# Allegro board PROJECT_PCB.brd
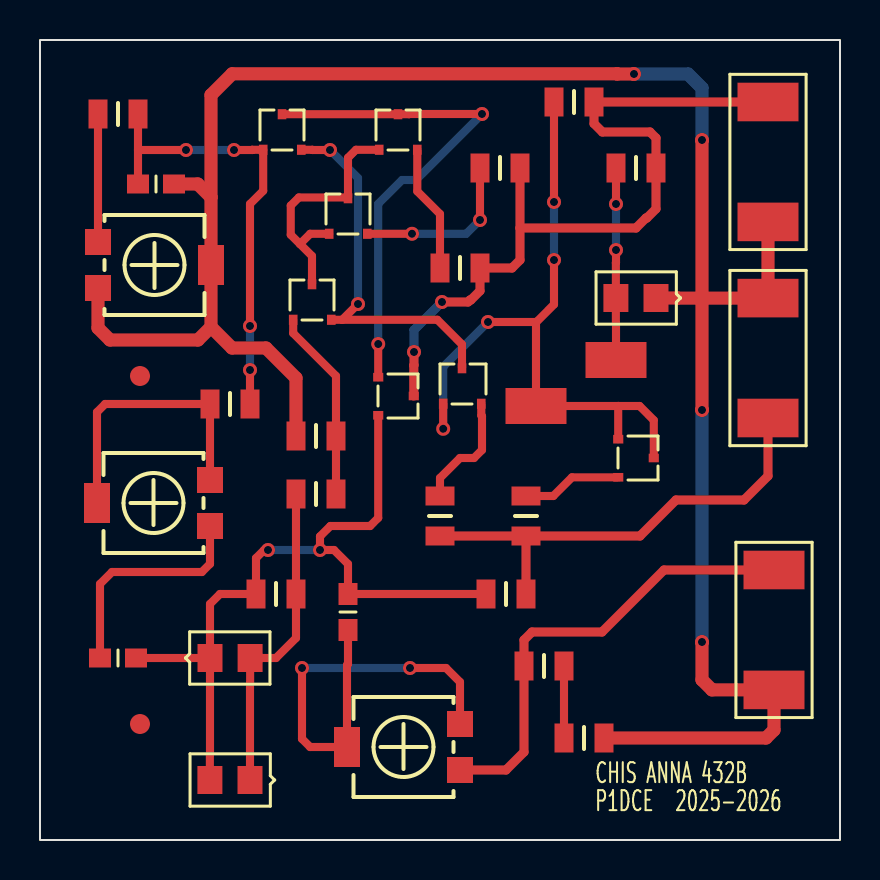
[diagram p0: board, top side]
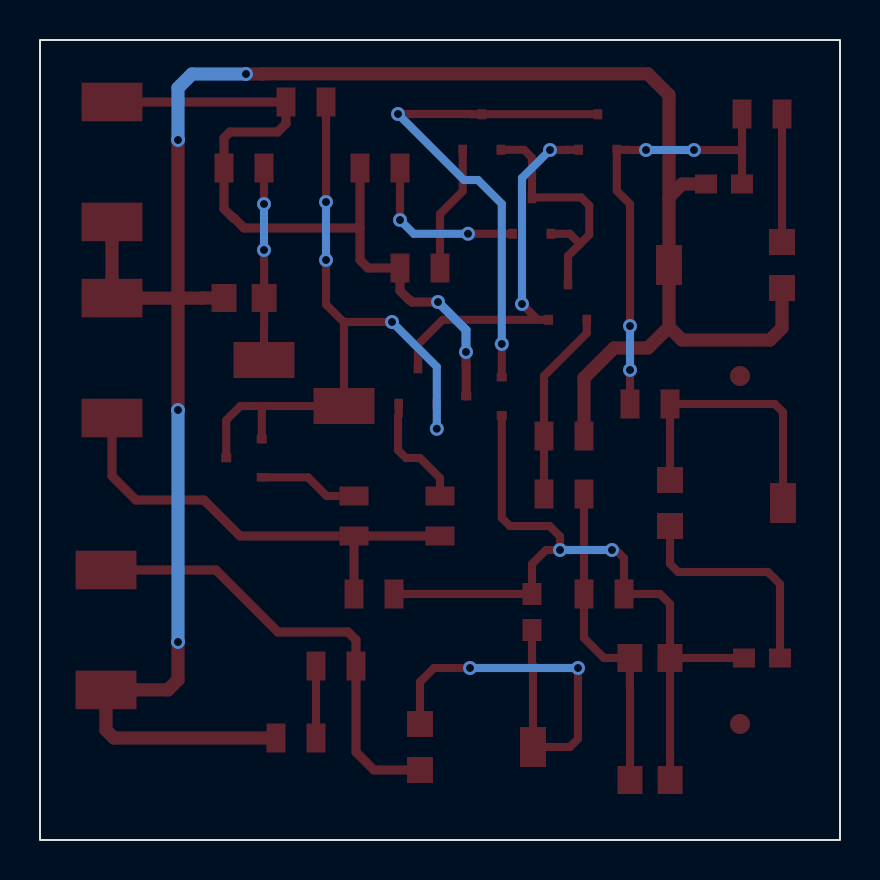
[diagram p1: board, bottom side, seen from below]

Outline 40 x 40 mm; copper layers: TOP, BOTTOM. Coordinates in mm from the lower left corner of the outline.
Outline path: rectangle 0,0 40,40

## Design rules (mm)
nets with their own width: min track width 0.406; nets N97755 N97835 N97875 N97939 N97965 N97969 N97983 N98131 N98141 N98233 N98621 N98633 N98691 N105812 N977031 N977231 N983391 N983651
nets with their own width: min track width 0.457; nets OUT V+ V-
nets with their own width: min track width 0.66; nets GND

## Placement (name value [footprint] x y rotation side)
C1  33n  [CAPC2008X126N_0805]  5.8 32.8 180 top
C2  33n  [CAPC2008X126N_0805]  3.9 9.1 0 top
C3  4.7u  [CAPC2008X126N_0805]  15.4 11.4 270 top
D1  D1N4148  [SMD0805]  8.5 9.1 0 top
D2  D1N4148  [SMD0805]  10.5 3 180 top
D3  5V,LED,LED  [SMD0805]  30.8 27.1 180 top
J1  CON2  [SMR2512]  36.4 36.9 270 top
J2  CON2  [SMR2512]  36.4 21.1 90 top
J3  CON2  [SMR2512]  36.7 13.5 270 top
NOREF  -  []  0 41.3 0 top
NOREF#2  -  [unnamed#2]  5 23.2 0 top
NOREF#3  -  [unnamed#2]  5 5.8 0 top
NOREF#4  -  []  40.8 0 90 top
Q1  QBC856B  [SOT23]  17.9 35.4 90 top
Q2  QBC856B  [SOT23]  15.4 31.2 90 top
Q3  QBC846B  [SOT23]  12.1 35.4 90 top
Q4  QBC846B  [SOT23]  13.6 26.9 90 top
Q5  QBC846B  [SOT23]  29.8 19.1 0 top
Q6  QBC846B  [SOT23]  21.1 22.7 90 top
Q7  QBC856B  [SOT23]  17.8 22.2 0 top
R1  1k  [RES2012X50N_0805]  29.8 33.6 0 top
R2  220  [RES2012X50N_0805]  23 33.6 0 top
R3  220  [RES2012X50N_0805]  21 28.6 0 top
R4  4.7k  [RES2012X50N_0805]  26.7 36.9 0 top
R5  1k  [RES2012X50N_0805]  24.3 16.2 90 top
R6  1k  [RES2012X50N_0805]  20 16.2 90 top
R7  1k  [RES2012X50N_0805]  13.8 20.2 0 top
R8  2k  [RES2012X50N_0805]  13.8 17.3 0 top
R9  100  [RES2012X50N_0805]  11.8 12.3 180 top
R10  10k  [RES2012X50N_0805]  23.3 12.3 180 top
R11  50k  [TS53YL]  21 5.8 0 top
R12  10  [RES2012X50N_0805]  3.9 36.3 0 top
R13  50k  [TS53YL]  2.9 27.6 180 top
R14  10  [RES2012X50N_0805]  9.5 21.8 0 top
R15  50k  [TS53YL]  8.5 18 0 top
R16  330  [RES2012X50N_0805]  25.2 8.7 180 top
R17  68  [RES2012X50N_0805]  27.2 5.1 180 top
TP1  TEST POINT  [SMD_PAD_3-05_1-80]  28.8 24 0 top
TP2  Q5  [SMD_PAD_3-05_1-80]  24.8 21.7 0 top

## Library data of the parts
C1-C3 = C
D1 = 1N4148_3
D2 = 1N4148_4
D3 = LED_2
J1-J3 = CON2
Q1 = QBC856B_2
Q2 = QBC856B_3
Q3 = QBC846B_3
Q4 = QBC846B_5
Q5 = QBC846B_6
Q6 = QBC846B_7
Q7 = QBC856B_4
R1-R10 R12 R14 R16 R17 = R
R11 R13 = POT
R15 = POT_1
TP1 TP2 = TEST POINT

## Footprints (pads in the part's own frame, mm; a bottom-side part is the same pattern mirrored in y, then rotated)
CAPC2008X126N_0805
  rect 1.1x0.95 smd: 1(-0.9,0) 2(0.9,0)
RES2012X50N_0805
  rect 0.95x1.45 smd: 1(-1,0) 2(1,0)
SMD0805
  rect 1.25x1.4 smd: A(2.007,0) C(0,0)
SMD_PAD_3-05_1-80
  rect 3.05x1.8 smd: 1(0,0)
SMR2512
  rect 1.93x3.048 smd: 1(0,0) 2(5.994,0)
SOT23
  rect 0.508x0.432 smd: 1(-0.889,0.94) 2(-0.889,-0.965) 3(0.889,0)
TS53YL
  rect 1.3x1.3 smd: 1(0,0) 3(0,-2.3)
  rect 1.3x2 smd: 2(-5.65,-1.15)
unnamed#2
  round 1 smd: (0,0)

## Nets
GND: C1.1 D3.C(2) J1.2 J2.2 J3.2 R7.1 R13.1 R13.2(T) R17.1
OUT: J3.1 R11.3 R16.2
V+: J1.1 Q7.3 R1.2 R2.2 R3.2 R4.2
V-: J2.1 R5.1 R6.1 R10.1
N97755: D3.A R1.1 TP1.1
N97835: Q1.1 Q2.1 Q2.3 Q4.3
N97875: Q1.3 Q3.3 Q7.1
N97939: Q5.1 Q5.3 Q6.1 R4.1 TP2.1
N97965: C2.2 C3.1 D1.C(2) D2.A Q7.2(E) R9.2 R10.2
N97969: D1.A D2.C(2) R8.1 R9.1
N97983: C3.2 R11.1 R11.2(T)
N98131: C1.2 Q3.1 R12.2 R14.2
N98141: Q4.1 R7.2 R8.2
N98233: Q3.2(E) Q4.2(E) Q6.3
N98621: R14.1 R15.1 R15.2(T)
N98633: C2.1 R15.3
N98691: R12.1 R13.3
N105812: R16.1 R17.2
N977031: Q1.2(E) R3.1
N977231: Q2.2(E) R2.1
N983391: Q5.2(E) R5.2
N983651: Q6.2(E) R6.2

## Via types
v1: diameter 0.7, hole 0.4, TOP to BOTTOM, 26 vias

## Routing (per net, layer and track width the routed paths; a pad name or vN(x,y) marks a point on that pad's centre or on a via; arc(x,y) is an arc through that point)
GND: length 108.9
  TOP w0.66: 33.1,27.09 31.87,27.09 31.87,27.1 D3.C ; 33.1,27.09 v1(33.1,35) ; 33.1,27.09 v1(33.1,21.5) ; 33.1,27.09 J2.2 J1.2 ; C1.1 7.89,32.8 8.55,32.14 ; v1(33.1,9.9) 33.1,8.01 33.6,7.51 J3.2 36.7,5.5 36.3,5.1 R17.1 ; 8.55,25.65 7.9,25 3.5,25 2.9,25.6 R13.1 ; 8.55,25.65 9.6,24.6 11.3,24.6 12.8,23.1 R7.1 ; 8.55,25.65 R13.2 8.55,32.14 ; 8.55,32.14 8.55,37.25 9.61,38.31 28.85,38.31 28.86,38.3 v1(29.7,38.3)
  BOTTOM w0.66: v1(33.1,35) 33.1,37.6 32.4,38.3 v1(29.7,38.3) ; v1(33.1,21.5) v1(33.1,9.9)
OUT: length 23.1
  TOP w0.457: J3.1 31.2,13.5 28.1,10.4 24.6,10.4 24.2,10 R16.2 24.2,4.4 23.3,3.5 R11.3
V+: length 39.2
  TOP w0.457: 24,30.6 R2.2 ; 24,30.6 29.8,30.6 30.3,31.1 30.34,31.1 30.8,31.56 R1.2 30.8,35.1 30.5,35.4 28.12,35.4 27.7,35.82 R4.2 J1.1 ; 24,30.6 24,29 23.6,28.6 R3.2 22,27.46 21.54,27 21.5,27 21.4,26.9 v1(20.1,26.9) ; Q7.3 18.69,23.73 18.7,23.74 v1(18.7,24.4)
  BOTTOM w0.457: v1(18.7,24.4) 18.7,25.5 v1(20.1,26.9)
V-: length 23.4
  TOP w0.457: J2.1 36.4,18.2 35.2,17 31.8,17 30,15.2 R5.1 ; R10.1 R5.1 ; R5.1 R6.1
N97755: length 9.6
  TOP w0.406: v1(28.8,29.5) 28.8,28.86 28.79,28.86 D3.A 28.79,25.8 28.8,25.8 TP1.1 ; R1.1 v1(28.8,31.8)
  BOTTOM w0.406: v1(28.8,31.8) v1(28.8,29.5)
N97835: length 12.8
  TOP w0.406: Q2.3 15.4,32.13 ; 15.4,32.13 15.4,34.11 15.8,34.51 16.96,34.51 ; 15.4,32.13 12.94,32.13 12.54,31.72 12.54,30.26 13,29.8 ; 13,29.8 13.51,30.31 Q2.1 ; 13,29.8 13.6,29.2 Q4.3
N97875: length 25.7
  TOP w0.406: Q7.1 v1(16.91,24.8) ; Q3.3 Q1.3 18.45,36.29 18.46,36.3 v1(22.1,36.3)
  BOTTOM w0.406: v1(22.1,36.3) 18.8,33 18.1,33 16.91,31.81 v1(16.91,24.8)
N97939: length 35.2
  TOP w0.406: 24.8,25.88 TP2.1 28.91,21.7 ; 24.8,25.88 24.78,25.9 v1(22.4,25.9) ; 24.8,25.88 25.7,26.78 v1(25.7,29) ; 28.91,21.7 Q5.1 ; 28.91,21.7 29.98,21.7 30.69,20.99 Q5.3 ; Q6.1 v1(20.16,20.56) ; R4.1 v1(25.7,31.9)
  BOTTOM w0.406: v1(25.7,31.9) v1(25.7,29) ; v1(20.16,20.56) 20.16,23.66 v1(22.4,25.9)
N97965: length 39.4
  TOP w0.406: v1(11.4,14.5) 11.21,14.5 10.8,14.09 R9.2 9,12.3 8.5,11.8 D1.C ; Q7.2 16.91,16.11 16.5,15.7 14.52,15.7 14,15.18 v1(14,14.5) 14.7,14.5 15.4,13.8 C3.1 R10.2 ; D1.C 8.5,4.3 8.49,4.3 D2.A ; D1.C C2.2
  BOTTOM w0.406: v1(11.4,14.5) v1(14,14.5)
N97969: length 16
  TOP w0.406: R8.1 R9.1 12.8,10.1 11.8,9.1 D1.A 10.51,7.8 10.5,7.8 D2.C
N97983: length 22.1
  TOP w0.406: C3.2 15.4,8.8 15.35,8.75 R11.2 13.51,4.65 13.1,5.06 v1(13.1,8.6) ; v1(18.5,8.6) 20.3,8.6 21,7.9 R11.1
  BOTTOM w0.406: v1(13.1,8.6) v1(18.5,8.6)
N98131: length 22.8
  TOP w0.406: v1(9.7,34.5) 10.61,34.5 10.61,34.51 11.16,34.51 11.16,32.46 10.5,31.8 v1(10.5,25.7) ; R14.2 v1(10.5,23.5) ; R12.2 4.9,34.5 ; 4.9,34.5 C1.2 ; 4.9,34.5 v1(7.3,34.5)
  BOTTOM w0.406: v1(7.3,34.5) v1(9.7,34.5) ; v1(10.5,23.5) v1(10.5,25.7)
N98141: length 9.6
  TOP w0.406: Q4.1 12.66,25.34 14.8,23.2 R7.2 R8.2
N98233: length 19.1
  TOP w0.406: 15.11,26.01 v1(15.9,26.8) ; 15.11,26.01 Q4.2 ; 15.11,26.01 19.87,26.01 21.1,24.78 Q6.3 ; 13.07,34.51 13.61,34.51 13.62,34.5 v1(14.5,34.5)
  BOTTOM w0.406: v1(15.9,26.8) 15.9,33.1 v1(14.5,34.5)
N98621: length 14.2
  TOP w0.406: R15.1 R14.1 3.26,21.8 2.85,21.39 R15.2
N98633: length 11.5
  TOP w0.406: R15.3 8.5,13.81 8.09,13.4 3.6,13.4 3,12.8 C2.1
N98691: length 6.4
  TOP w0.406: R12.1 R13.3
N105812: length 3.6
  TOP w0.406: R17.2 R16.1
N977031: length 6.4
  TOP w0.406: R3.1 20,31.3 18.87,32.43 18.87,34.51
N977231: length 8.5
  TOP w0.406: Q2.2 v1(18.6,30.31) ; v1(22,31) R2.1
  BOTTOM w0.406: v1(22,31) 21.31,30.31 v1(18.6,30.31)
N983391: length 5
  TOP w0.406: R5.2 25.67,17.2 26.6,18.13 Q5.2
N983651: length 5.9
  TOP w0.406: R6.2 20,18.1 21,19.1 21.7,19.1 22.1,19.5 22.1,21.19 22.07,21.23 Q6.2

## Text on the board
Ref Des/Silkscreen Top: CHIS ANNA 432B | P1DCE | 2025-2026
XSECTION_CHART: *  SURFACE | L1 TOP CONDUCTOR | *  DIELECTRIC | L2 BOTTOM CONDUCTOR | DESIGN CROSS SECTION CHART | ___________________________ | TOTAL THICKNESS 1.6 MM | 1-2
DIMENSION: FIGURE | FINISHED_SIZE | 0.4 | DRILL CHART: TOP to BOTTOM | ALL UNITS ARE IN MILLIMETERS | PLATED | QTY | 26
